# Altium PCB FlybackV1.0.PcbDoc
Units mm, origin at the board's own origin, x right, y up, seen from the top; angles counter-clockwise.
Board outline 151 x 58 mm, 2 copper layers (Top Layer, Bottom Layer), stack 1.671 mm thick; 111 components, 51 nets, 238 pads, 96 vias.
Unrouted connection lines stored in the file: 2.
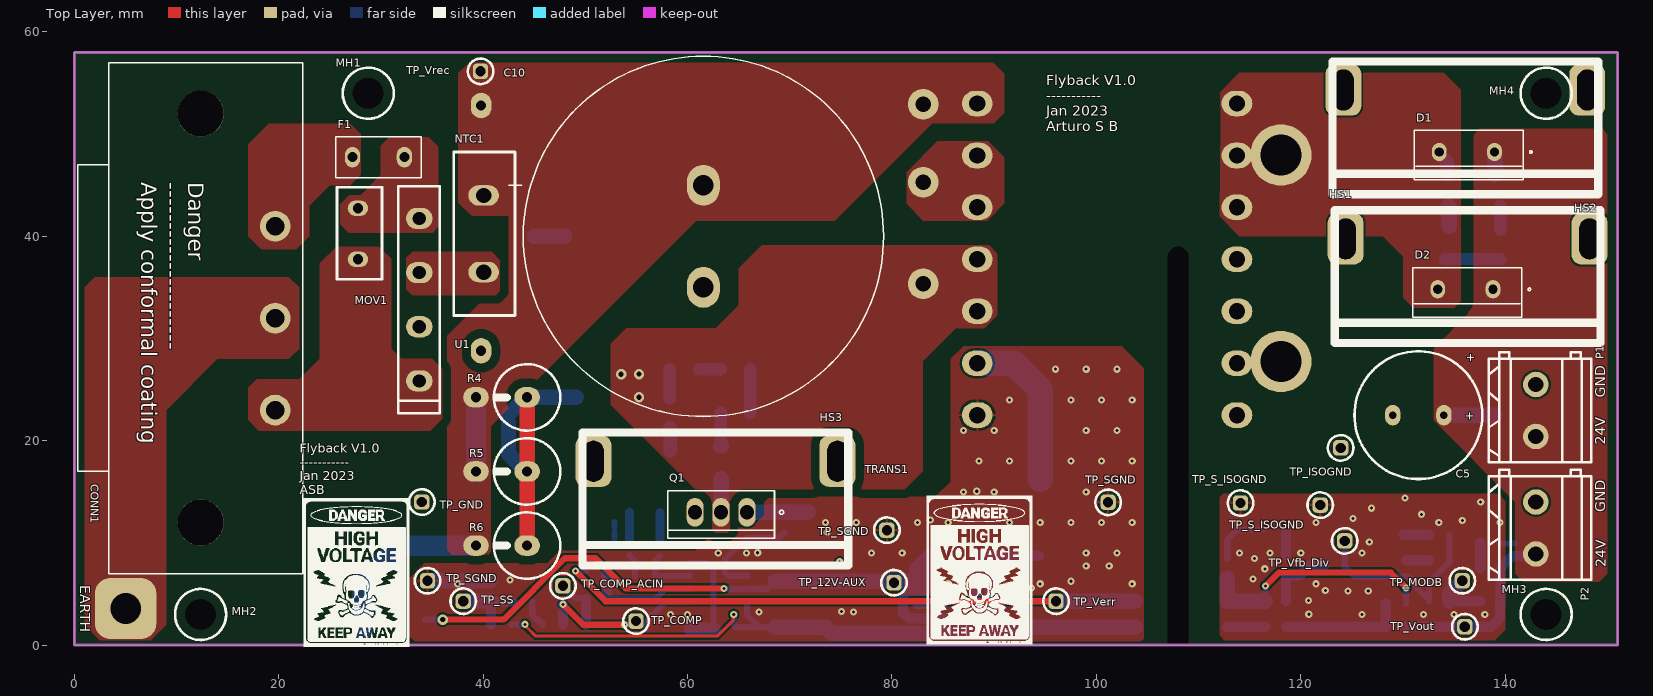
[diagram p0: Top Layer view]
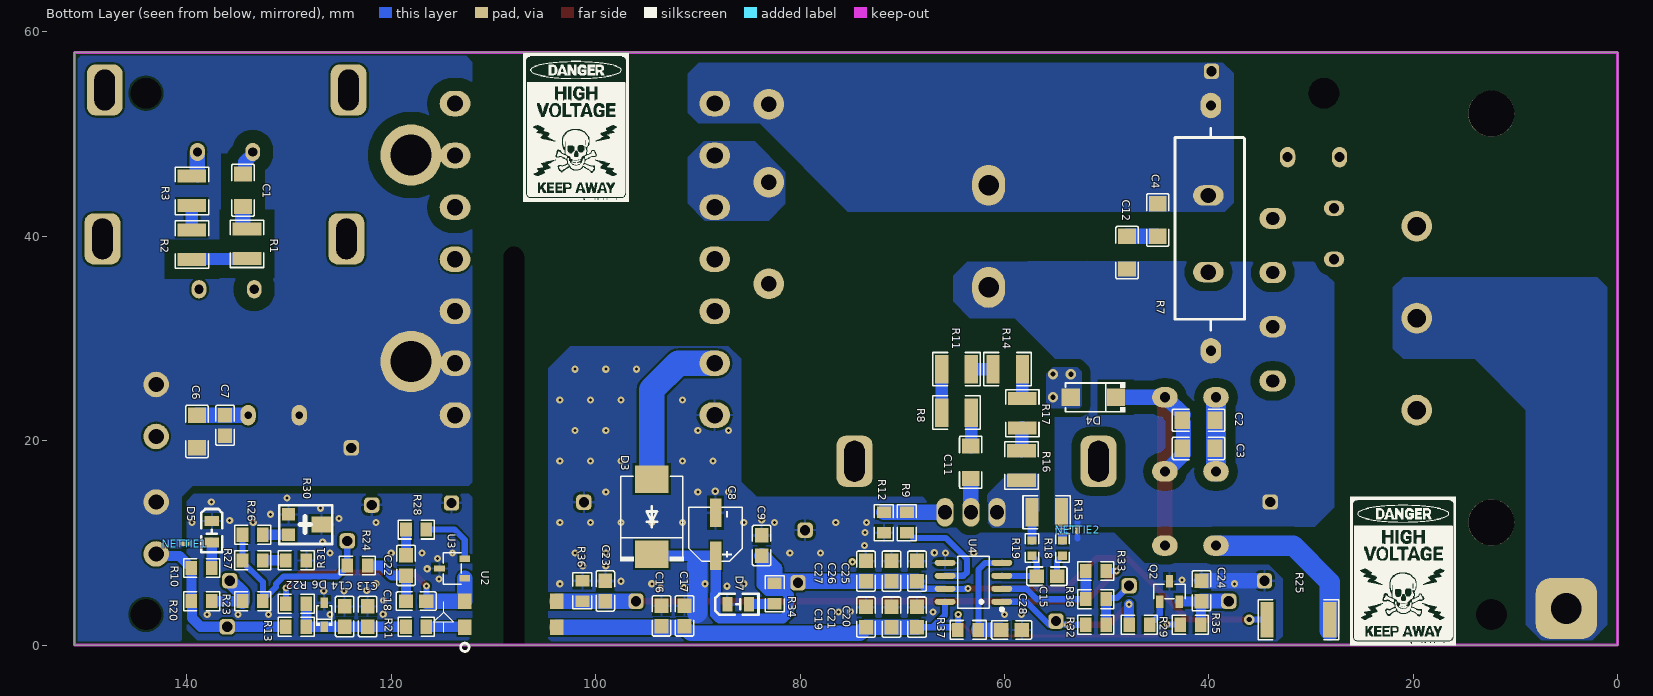
[diagram p1: Bottom Layer view, seen from below]

## Layer stack, top to bottom
Top Solder: solder mask 0.0102, Solder Resist, Dk 3.5
Top Layer: signal copper 0.0356
Dielectric 1: dielectric 1.6, FR-4, Dk 4.8
Bottom Layer: signal copper 0.0356
Bottom Solder: solder mask 0.0102, Solder Resist, Dk 3.5

## Board outline
0,58 0,0 151,0 151,58

## Design rules (kind name [scope] priority, off if disabled: settings)
Clearance SecHV_To_SecLV [InNetClass('HV_REF') vs InNetClass('LV-ISO')] p1: gap=1.25 ignorepadtopadclearanceinfootprint=TRUE
Clearance PRI_To_SEC [InNetClass('PRI') vs InNetClass('SEC')] p2: gap=5 ignorepadtopadclearanceinfootprint=FALSE
Clearance HVAC_To_HV&LV [InNetClass('HVAC') vs (InNetClass('HVAC') OR InNetClass('HV') OR InNetClass('LV') OR InNetClass('LV-ISO'))] p3: gap=0.86 ignorepadtopadclearanceinfootprint=FALSE
Clearance PriHV_To_PriLV_Coated [InNetClass('HV') vs InNetClass('LV')] p4: gap=0.86 ignorepadtopadclearanceinfootprint=FALSE // This rule assumes peak voltage of 500V
Clearance PriLV_To_PriLV [InNetClass('LV') vs InNetClass('LV')] p5: gap=0.2 ignorepadtopadclearanceinfootprint=FALSE
Clearance [All] p6: gap=0.2 ignorepadtopadclearanceinfootprint=FALSE
ComponentClearance [All] p1: gap=0.1 collisioncheckmode=3 verticalgap=0.1 showdistances=TRUE
Creepage PriHV_To_SecLV_Creepage [InNetClass('PRI') vs InNetClass('SEC')] p1: checkdistance=5 // This rule (5mm creepage distance) assumes material group III and worst pollution.
Height [All] p1: minheight=0 maxheight=60 prefheight=12.7
HoleSize [All] p1: absolutevalues=TRUE maxlimit=10 minlimit=0.025 maxpercent=80.000 minpercent=20.000
PolygonConnect Power_Planes [InNetClass('POWER_TRACE')] p1: connectstyle=Direct reliefconductorwidth=0.254 reliefentries=4 polygonreliefangle="90 Angle" airgapwidth=0.254
PolygonConnect [All] p2: thpad.connectstyle=Relief thpad.reliefconductorwidth=0.254 thpad.reliefentries=4 thpad.polygonreliefangle="90 Angle" thpad.airgapwidth=0.254 smdpad.connectstyle=Relief smdpad.reliefconductorwidth=0.254 smdpad.reliefentries=4 smdpad.polygonreliefangle="90 Angle" smdpad.airgapwidth=0.254 via.connectstyle=Direct via.reliefconductorwidth=0.254 via.reliefentries=4 via.polygonreliefangle="90 Angle" via.airgapwidth=0.254
RoutingVias [All] p1: holewidth=0.711 width=1.27 viastyle="Through Hole" minholewidth=0.711 minwidth=1.27 maxholewidth=0.711 maxwidth=1.27
ShortCircuit NETTIE_SEC [InNet('S_ISO_GND') vs InNet('ISO_GND')] p1: allowed=TRUE
ShortCircuit NETTIE_PRI [InNet('S_GND') vs InNet('GND')] p2: allowed=TRUE
ShortCircuit [All] p3: allowed=FALSE
SilkToSilkClearance [All] p1: silktosilkclearance=0
SilkToSolderMaskClearance [IsPad] p1: minsilkscreentomaskgap=0 clearancetoexposedcopper=TRUE
SolderMaskExpansion Via [IsVia] p1: expansion=0.102 istentingtop=TRUE
SolderMaskExpansion [All] p2: expansion=0.102 istentingtop=FALSE
Width [All] p1: maxlimit=6 minlimit=0.3 preferedwidth=1.5
24 further rules are at their usual default settings.

## Classes and differential pairs
net class POWER_TRACE: EARTH_GND GND HALF_PRI ISO_GND NetC1_1 NetC1_2 NetC2_1 NetC4_1 NetC11_1 NetCONN1_L NetCONN1_N NetF1_1 NetR1_2 NetR2_1 NetR8_1 NetR11_2 NetR14_2 NetR16_1 Vout Vrec Vrec-NTC Vsense Vsense_fil_H Vsense_fil_L
net class HV_REF: NetC1_1 NetC1_2 NetR1_2
net class SEC: ISO_GND NetC1_1 NetC1_2 NetC13_2 NetC18_1 NetC18_2 NetC22_1 NetD5_1 NetHS1_HSMH NetHS2_HSMH NetR1_2 NetR2_1 NetR20_1 NetR21_1 NetR23_1 NetR26_1 NetR27_1 NetR28_1 S_ISO_GND Vout
net class PRI: 12V-AUX EARTH_GND GND HALF_PRI NetC2_1 NetC4_1 NetC11_1 NetC11_2 NetC23_2 NetC24_1 NetC28_1 NetCONN1_L NetCONN1_N NetD3_2 NetD7_1 NetF1_1 NetQ1_1 NetQ2_2 NetR8_1 NetR11_2 NetR14_2 NetR16_1 NetR32_2 NetR33_1 S_GND Vcomp Vpwm Vrec Vrec-NTC Vref-5V Vsense Vsense_fil_H Vsense_fil_L
net class HVAC: EARTH_GND NetCONN1_L NetCONN1_N NetF1_1
net class LV: 12V-AUX GND NetC23_2 NetC24_1 NetC28_1 NetD3_2 NetD7_1 NetQ1_1 NetQ2_2 NetR16_1 NetR32_2 NetR33_1 S_GND Vcomp Vpwm Vrec Vref-5V Vsense Vsense_fil_H Vsense_fil_L
net class LV-ISO: ISO_GND NetC1_1 NetC1_2 NetC13_2 NetC18_1 NetC18_2 NetC22_1 NetD5_1 NetR1_2 NetR2_1 NetR20_1 NetR21_1 NetR23_1 NetR26_1 NetR27_1 NetR28_1 S_ISO_GND Vout
net class HV: NetC2_1 NetC4_1 NetC11_1 NetC11_2 NetCONN1_E NetR8_1 NetR11_2 NetR14_2 Vrec Vrec-NTC

## Components (designator, comment, footprint, x,y, rotation, side; value= is the part's Value field where it differs from the comment)
C1 "CAP_33P_1206_630V_COG_5%" CAP_1206 134.5,44.507 r270 bottom value=33pF
C2 "CAP_33N_1206_630V_X7R_10%" CAP_1206 41,22 r180 bottom value=33nF
C3 "CAP_33N_1206_630V_X7R_10%" CAP_1206 41,19.25 r180 bottom value=33nF
C4 "CAP_33N_1206_630V_X7R_10%" CAP_1206 45,41.593 r90 bottom value=33nF
C5 "CAP_1M5_35V_20%_TH-Radial-P5mm-D12.5mm-H16mm" CAP_TH_Radial_P5mm_D12.5mm_H16mm 131.5,22.5 r90 top value=1.5mF
C6 "CAP_100N_1206_35V_X7R_10%" CAP_1206 139,20.907 r90 bottom value=100nF
C7 "CAP_1U_0805_50V_X7R_10%" CAP_0805 136.25,20.5 r90 bottom value=1uF
C8 "CAP_22U_35V_20%_SMD-D5mm-L5.3mm" CAP_SMD_D5mm-L5.3mm 88.25,10.75 r90 bottom value=22uF
C9 "CAP_100N_0805_50V_X7R_10%" CAP_0805 83.75,10.75 r270 bottom value=100nF
C10 "CAP_390U_450V_20%_TH-Radial-P10mm-D35mm-H27.5mm" CAP_TH_Radial_P10mm_D35mm_H27.5mm 61.549,39.999 r180 top locked value=390uF
C11 "CAP_33P_1206_630V_COG_5%" CAP_1206 63.3,17.893 r90 bottom value=33pF
C12 "CAP_33N_1206_630V_X7R_10%" CAP_1206 48,38.407 r90 bottom value=33nF
C13 "CAP_10U_0805_50V_X5R_10%" CAP_0805 122.3,3.8 r270 bottom value=10uF
C14 "CAP_100N_0805_50V_X7R_10%" CAP_0805 124.55,3.8 r270 bottom value=100nF
C15 "CAP_1N_0805_25V_X7R_10%" CAP_0805 56.841,6.741 r180 bottom value=1nF
C16 "CAP_100N_0805_50V_X7R_10%" CAP_0805 93.55,3.855 r270 bottom value=100nF
C17 "CAP_10U_0805_50V_X5R_10%" CAP_0805 91.3,3.855 r270 bottom value=10uF
C18 "CAP_120P_0805_50V_X7R_10%" CAP_0805 118.55,4.3 r180 bottom value=120pF
C19 "CAP_100N_0805_50V_X7R_10%" CAP_0805 73.549,3.745 r270 bottom value=100nF
C20 "CAP_10U_0805_50V_X5R_10%" CAP_0805 68.549,3.745 r270 bottom value=10uF
C21 "CAP_10U_0805_50V_X5R_10%" CAP_0805 71.049,3.745 r270 bottom value=10uF
C22 "CAP_22N_0805_50V_X7R_10%" CAP_0805 118.55,8.8 r270 bottom value=22nF
C23 "CAP_22N_0805_50V_X7R_10%" CAP_0805 99.05,6.3 r270 bottom value=22nF
C24 "CAP_4N7_0805_50V_X7R_10%" CAP_0805 40.724,4.311 r90 bottom value=4.7nF
C25 "CAP_10U_0805_50V_X5R_10%" CAP_0805 68.549,8.245 r270 bottom value=10uF
C26 "CAP_10U_0805_50V_X5R_10%" CAP_0805 71.049,8.245 r270 bottom value=10uF
C27 "CAP_100N_0805_50V_X7R_10%" CAP_0805 73.549,8.245 r270 bottom value=100nF
C28 "CAP_4N7_0805_50V_X7R_10%" CAP_0805 60.299,1.495 r180 bottom value=4.7nF
CONN1 "AC_CONNECTOR" AC_CONNECTOR_703W-00/54 16,32 r90 top locked
D1 "DIODE_600V_3KPW8_SIC_T0220" T0-220-2 138.949,48.249 r180 top
D2 "DIODE_600V_3KPW8_SIC_T0220" T0-220-2 138.799,34.817 r180 top
D3 "DIODE_200V_3A_20ns_SMC" DIODE_SMC 94.5,12.564 r90 bottom
D4 "DIODE_600V_1A_100ns_SMA" SMA_L4.4-W2.6-LS5.0-RD 51.299,24.245 r0 bottom
D5 "LED_GREEN_0805_25mA" LED_0805 137.55,11.151 r270 bottom
D6 "ZENER_16V_SOD323_200mW" ZENER_SOD-323 126.55,2.973 r90 bottom
D7 "LED_GREEN_0805_25mA" LED_0805 86.101,4 r180 bottom
F1 "FUSE_3.15A_250VAC_64VDC_SlowBlow_BoardMount" FUSE_P5.08mm_W4mm_L8.35mm_H7.8mm 29.75,47.75 r180 top locked
HS1 "HEATSINK_TO-220_14.7KPW" HEATSINK_TO-220_HSS-B20-NPS-02 136.317,39.75 r0 top locked
HS2 "HEATSINK_TO-220_14.7KPW" HEATSINK_TO-220_HSS-B20-NPS-02 136.099,54.316 r0 top locked
HS3 "HEATSINK_TO-220_14.7KPW" HEATSINK_TO-220_HSS-B20-NPS-02 62.73,17.99 r0 top locked
MH1 "MOUNTINGHOLE_HDM3_OD3mm" STANDOFF_HDM3_OD5MM 28.75,54 r0 top locked
MH2 "MOUNTINGHOLE_HDM3_OD3mm" STANDOFF_HDM3_OD5MM 12.35,3 r0 top locked
MH3 "MOUNTINGHOLE_HDM3_OD3mm" STANDOFF_HDM3_OD5MM 144,3 r0 top locked
MH4 "MOUNTINGHOLE_HDM3_OD3mm" STANDOFF_HDM3_OD5MM 144,54 r0 top locked
MOV1 "MOV_VC595_VAC230" MOV_P5mm_D9mm_W4.4mm 27.75,40.25 r90 top locked
NETTIE1 "NETTIE" NETTIE 140.382,9.931 r270 bottom
NETTIE2 "NETTIE" NETTIE 52.841,11.496 r0 bottom
NTC1 "NTC_15R_4.4A_D16mm" NTC_P7.5mm_D16mm 40.049,40.249 r270 top locked
P1 "SCREWTERMINAL_P5.08mm" SCREW_TERMINAL_P5.08mm 143,20.42 r90 top locked
P2 "SCREWTERMINAL_P5.08mm" SCREW_TERMINAL_P5.08mm 143,8.92 r90 top locked
Q1 "NMOS_700V_IPA70R360P7SXKSA1" T0-220-3 65.813,12.999 r180 top locked
Q2 "PNP_12V_2.5A_SOT-23-3" SOT-23-3 43.849,5.245 r270 bottom
R1 "RES_82R_1210_0.5W_1%" RES_1210 134.1,40.7 r270 bottom value=82R
R2 "RES_82R_1210_0.5W_1%" RES_1210 139.5,40.633 r270 bottom value=82R
R3 "RES_0R_1206_0.25W_1%" RES_1210 139.5,45.883 r270 bottom value=0R
R4 "RES_9K1_TH_5W_5%_AXIAL" RES_TH_AXIAL_L17.5mm_D6.5mm_Vertical 44.299,24.245 r180 top value=9K1R
R5 "RES_9K1_TH_5W_5%_AXIAL" RES_TH_AXIAL_L17.5mm_D6.5mm_Vertical 44.299,16.995 r180 top value=9K1R
R6 "RES_9K1_TH_5W_5%_AXIAL" RES_TH_AXIAL_L17.5mm_D6.5mm_Vertical 44.299,9.745 r180 top value=9K1R
R7 "RES_200K_TH_1W_5%_AXIAL" RES_TH_AXIAL_L18mm_D6.8mm 39.8,28.8 r90 bottom value=200KR
R8 "RES_82R_1210_0.5W_1%" RES_1210 66.133,22.75 r180 bottom value=82R
R9 "RES_12R_0805_0.125W_5%" RES_0805 69.549,11.995 r270 bottom value=12R
R10 "RES_1K5_0805_0.125W_1%" RES_0805 138.55,7.55 r0 bottom value=1K5
R11 "RES_82R_1210_0.5W_1%" RES_1210 66.133,27 r180 bottom value=82R
R12 "RES_10K_0805_0.125W_1%" RES_0805 71.799,11.995 r90 bottom value=10K
R13 "RES_680R_0805_0.125W_1%" RES_0805 129.3,1.8 r0 bottom value=680R
R14 "RES_82R_1210_0.5W_1%" RES_1210 61.133,27 r180 bottom value=82R
R15 "RES_220mR_1210_0.75W_1%" RES_1210 57.313,12.999 r180 bottom value=220mR
R16 "RES_0R_1206_0.25W_1%" RES_1210 58.332,19.017 r270 bottom value=0R
R17 "RES_82R_1210_0.5W_1%" RES_1210 58.25,24.133 r270 bottom value=82R
R18 "RES_82R_0603_0.1W_1%" RES_0603 54.313,9.496 r90 bottom value=82R
R19 "RES_82R_0603_0.1W_1%" RES_0603 57.313,9.496 r90 bottom value=82R
R20 "RES_22R_0805_0.125W_1%" RES_0805 138.55,4.3 r0 bottom value=22R
R21 "RES_1K8_0805_0.125W_1%" RES_0805 117.55,1.8 r0 bottom value=1K8
R22 "RES_5K6_0805_0.125W_1%" RES_0805 129.3,4.05 r180 bottom value=5K6
R23 "RES_11K8_0805_0.125W_1%" RES_0805 133.55,4.3 r0 bottom value=11K8
R24 "RES_0R_0805_0.125W_1%" RES_0805 123.3,7.8 r180 bottom value=0R
R25 "RES_560K_2512_1W_1%" RES_2512 31.233,2.495 r0 bottom value=560K
R26 "RES_0R_0805_0.125W_1%" RES_0805 133.55,10.8 r0 bottom value=0R
R27 "RES_1K37_0805_0.125W_1%" RES_0805 133.55,8.3 r0 bottom value=1K37
R28 "RES_180K_0805_0.125W_1%" RES_0805 117.55,11.3 r0 bottom value=180K
R29 "RES_0R_0805_0.125W_1%" RES_0805 46.799,1.995 r0 bottom value=0R
R30 "RES_5K_SMD-POT_0.15mW_25%" RES_SMD_POT_3PINS 128.425,11.8 r0 bottom value=5KR
R31 "RES_0R_0805_0.125W_1%" RES_0805 129.3,8.3 r0 bottom value=0R
R32 "RES_22R_0805_0.125W_1%" RES_0805 51.049,1.995 r180 bottom value=22R
R33 "RES_22K_0805_0.125W_1%" RES_0805 51.049,7.245 r180 bottom value=22K
R34 "RES_1K_0805_0.125W_1%" RES_0805 82.475,5.035 r90 bottom value=1K
R35 "RES_100K_0805_0.125W_1%" RES_0805 41.799,1.995 r0 bottom value=100K
R36 "RES_1K5_0805_0.125W_1%" RES_0805 101.3,5.3 r270 bottom value=1K5
R37 "RES_3K_0805_0.125W_1%" RES_0805 63.549,1.495 r0 bottom value=3K
R38 "RES_22K_0805_0.125W_1%" RES_0805 51.049,4.495 r180 bottom value=22K
TP_12V-AUX "TESTPOINT_BD2.5mm_MHD1mm" Test_Point_BD2.5mm_MHD_1mm 80.193,6.106 r90 top
TP_COMP "TESTPOINT_BD2.5mm_MHD1mm" Test_Point_BD2.5mm_MHD_1mm 54.95,2.35 r90 top
TP_COMP_ACIN "TESTPOINT_BD2.5mm_MHD1mm" Test_Point_BD2.5mm_MHD_1mm 47.8,5.8 r90 top
TP_GND "TESTPOINT_BD2.5mm_MHD1mm" Test_Point_BD2.5mm_MHD_1mm 34,14 r90 top
TP_ISOGND "TESTPOINT_BD2.5mm_MHD1mm" Test_Point_BD2.5mm_MHD_1mm 123.9,19.3 r90 top
TP_MODB "TESTPOINT_BD2.5mm_MHD1mm" Test_Point_BD2.5mm_MHD_1mm 135.8,6.3 r90 top
TP_S_ISOGND "TESTPOINT_BD2.5mm_MHD1mm" Test_Point_BD2.5mm_MHD_1mm 121.9,13.7 r90 top
TP_S_ISOGND "TESTPOINT_BD2.5mm_MHD1mm" Test_Point_BD2.5mm_MHD_1mm 114.1,13.9 r90 top
TP_SGND "TESTPOINT_BD2.5mm_MHD1mm" Test_Point_BD2.5mm_MHD_1mm 101.148,13.977 r90 top
TP_SGND "TESTPOINT_BD2.5mm_MHD1mm" Test_Point_BD2.5mm_MHD_1mm 34.55,6.3 r90 top
TP_SGND "TESTPOINT_BD2.5mm_MHD1mm" Test_Point_BD2.5mm_MHD_1mm 79.5,11.25 r90 top
TP_SS "TESTPOINT_BD2.5mm_MHD1mm" Test_Point_BD2.5mm_MHD_1mm 38.05,4.3 r90 top
TP_Verr "TESTPOINT_BD2.5mm_MHD1mm" Test_Point_BD2.5mm_MHD_1mm 96.05,4.3 r90 top
TP_Vfb_Div "TESTPOINT_BD2.5mm_MHD1mm" Test_Point_BD2.5mm_MHD_1mm 124.3,10.2 r180 top
TP_Vout "TESTPOINT_BD2.5mm_MHD1mm" Test_Point_BD2.5mm_MHD_1mm 136.05,1.8 r90 top
TP_Vrec "TESTPOINT_BD2.5mm_MHD1mm" Test_Point_BD2.5mm_MHD_1mm 39.744,56.146 r90 top (schematic designator TP_VREC)
TRANS1 "Transformer_ETD34_SPLIT" ETD34_HORIZONTAL_EXTRAPADS 101.049,37.749 r90 top locked
U1 "DiodeBrige_600V_4A_TH-4-SIP-5.3mm" 4_SIP 33.75,41.75 r270 top locked
U2 "OPTOCOUPLER_SFH615A-4XSMT/R" 4-SMD 108.299,3.015 r0 bottom
U3 "TL431AQDBZR" SOT-23 112.8,6.55 r180 bottom
U4 "UC3842AD8TR" SOIC-8 60.254,4.245 r90 bottom locked

## Footprints (in the part's own frame and the unit in brackets; to place one, negate y for a bottom-side part, rotate by r counter-clockwise, add the part's x,y. Pads: shape width x height; smd on the part's side, far side on the other; paste and mask are expansions set on the pad)
4-SMD [mm]
  rect 1.3x1.5 smd: 1(4.5,1.27) 2(4.5,-1.27) 3(-4.5,-1.27) 4(-4.5,1.27)
  silkscreen extent 4.08,-1.25 7.58,3.64, body extent -5.23,-2.55 5.23,2.55, height 4.61
4_SIP [mm]
  oval 2.08x2.6 hole 1.3: 1(0,0) 2(5.3,0) 3(10.6,0) 4(15.9,0)
  silkscreen extent -3.16,-2.04 19.06,2.01, body extent -3.16,-2.02 19.09,2.02, height 19.1
AC_CONNECTOR_703W-00/54 [mm]
  round 3 hole 1.8: E(0,-3.65) L(9,-3.65) N(-9,-3.65)
  round 4.5 hole 4.5: MH1(-20,3.65) MH2(20,3.65)
  silkscreen extent -25,-6.35 25,15.65, body extent -25,-9.1 25,15.5, height 28.21
CAP_0805 [mm]
  rect 1.41x1.35 smd: 1(0,0) 2(2,0)
  silkscreen extent -0.96,-0.9 2.96,0.9
CAP_1206 [mm]
  rect 1.485x1.728 smd: 1(-1.593,0) 2(1.593,0)
  silkscreen extent -2.56,-1.09 2.56,1.09
CAP_SMD_D5mm-L5.3mm [mm]
  rect 2.8x1.1 smd: 1(-2,0) 2(2.2,0)
  silkscreen extent -2.56,-2.62 2.76,2.65
CAP_TH_Radial_P5mm_D12.5mm_H16mm [mm]
  oval 2x1.5 hole 0.75: 1(0,-2.5) 2(0,2.5)
  silkscreen extent -6.25,-6.25 6.25,6.25, body extent -6.25,-6.25 6.25,6.25, height 16
CAP_TH_Radial_P10mm_D35mm_H27.5mm [mm]
  oval 3.2x4 hole 2: 1(0,-5) 2(0,5)
  silkscreen extent -17.63,-17.62 19.02,17.63, body extent -17.5,-17.5 17.5,17.5, height 27.5
DIODE_SMC [mm]
  rect 2.7x3.3 smd: 1(-3.686,0) 2(3.686,0)
  silkscreen extent -4.36,-3.1 3.98,3.1
ETD34_HORIZONTAL_EXTRAPADS [mm]
  round 3 hole 1.5: 1(15.172,18) 2(7.543,18) 3(-2.406,18)
  oval 2.5x3 hole 1.6: 1(15.24,12.7) 2(5.08,12.7) 2(10.16,12.7) 3(-5.08,12.7) 3(0,12.7) 4(-10.16,12.7) 5(-15.24,12.7) 6(5.08,-12.7) 6(10.16,-12.7) 6(15.24,-12.7) 7(-15.24,-12.7) 7(-10.16,-12.7) 7(-5.08,-12.7) 100(0,-12.7)
  round 6 hole 4: 6(10.202,-17) 7(-10,-17)
  body extent -19.8,-20.7 19.8,20.7, height 28.4
FUSE_P5.08mm_W4mm_L8.35mm_H7.8mm [mm]
  oval 1.5x2 hole 1: 1(-2.54,0) 2(2.54,0)
  silkscreen extent -4.18,-2 4.18,2, body extent -4.2,-2 4.2,2, height 7.8
HEATSINK_TO-220_HSS-B20-NPS-02 [mm]
  rrect50% 3.5x5 hole 2 slot 4 at 90 deg: HSMH(-11.933,0) HSMH(11.933,0)
  silkscreen extent -13,-10.2 13,2.8, body extent -12.7,-10.2 12.7,2.5, height 29.98
LED_0805 [mm]
  rect 1x1.4 smd: 1(1.101,0) 2(-1,0)
  silkscreen extent -2.17,-1.04 2.04,1.01
MOV_P5mm_D9mm_W4.4mm [mm]
  oval 1.5x2 hole 1: 1(-2.5,0) 2(2.5,0)
  silkscreen extent -4.44,-2.35 4.56,2.05, body extent -4.41,-2.34 4.59,2.06, height 11
NETTIE [mm]
  round 0.5 smd: GNDA(0,0.4) GNDB(0,0)
NTC_P7.5mm_D16mm [mm]
  oval 2x3 hole 1.5: 1(-3.75,0) 2(3.75,0)
  silkscreen extent -8,-2.93 8,3.07, body extent -8,-3 8,3, height 20
RES_0603 [mm]
  rect 0.806x0.864 smd: 1(-0.753,0) 2(0.753,0)
  silkscreen extent -1.39,-0.66 1.39,0.66
RES_0805 [mm]
  rect 1.133x1.377 smd: 1(-1,0) 2(1,0)
  silkscreen extent -1.76,-0.92 1.76,0.92
RES_1210 [mm]
  rect 1.283x2.808 smd: 1(0,0) 2(2.883,0)
  silkscreen extent -0.87,-1.63 3.75,1.63
RES_2512 [mm]
  rect 1.283x3.456 smd: 1(-3.066,0) 2(3.066,0)
  silkscreen extent -3.94,-1.96 3.94,1.96
RES_SMD_POT_3PINS [mm]
  rect 1.3x1.2 smd: 1(1.625,-1) 3(1.625,1)
  rect 2x1.524 smd: 2(-1.625,0)
  silkscreen extent -2.67,-1.91 2.54,1.91
RES_TH_AXIAL_L17.5mm_D6.5mm_Vertical [mm]
  oval 2.5x2 hole 1: 1(0,0) 2(5,0)
  silkscreen extent -3.25,-3.25 3.25,3.25
RES_TH_AXIAL_L18mm_D6.8mm [mm]
  oval 2.5x2 hole 1: 1(0,0) 2(24,0)
  silkscreen extent 2,-3.29 21.75,3.51
SCREW_TERMINAL_P5.08mm [mm]
  round 2.5 hole 1.5: 1(0,0) 2(5.08,0)
  silkscreen extent -2.54,-5.4 8.24,4.6
SMA_L4.4-W2.6-LS5.0-RD [mm]
  rect 1.8x1.7 smd: 1(-2.192,0) 2(2.192,0)
  silkscreen extent -3.11,-1.48 2.73,1.48
SOIC-8 [mm]
  oval 0.588x2.045 smd: 1(0,0) 2(1.27,0) 3(2.54,0) 4(3.81,0) 5(3.81,5.545) 6(2.54,5.545) 7(1.27,5.545) 8(0,5.545)
  silkscreen extent -0.9,-0.15 4.43,4.29
SOT-23 [mm]
  rect 1.07x0.6 smd: 1(0,0) 2(0,1.9) 3(-2.47,0.95)
  silkscreen extent -2.11,-0.59 -0.36,2.49
SOT-23-3 [mm]
  rect 1.25x0.7 smd: 1(1,0.95) 2(1,-0.95) 3(-1,0)
  silkscreen extent -0.73,-1.53 0.73,1.53
STANDOFF_HDM3_OD5MM [mm]
  round 0 hole 3 unplated: 50(0,0)
  silkscreen extent -2.5,-2.5 2.5,2.5
T0-220-2 [mm]
  oval 1.44x1.8 hole 0.9: 1(0,0) 2(5.4,0)
  silkscreen extent -3.68,-2.13 7.85,2.73, body extent -2.68,-1.98 7.71,2.62, height 15.75
T0-220-3 [mm]
  oval 1.68x2.8 hole 1.4: 1(0,0) 2(2.54,0) 3(5.08,0)
  silkscreen extent -3.58,-2.12 7.77,2.53, body extent -2.57,-1.99 7.65,2.4, height 17.3
Test_Point_BD2.5mm_MHD_1mm [mm]
  rrect50% 1.5x1.5 hole 1: 1(0,0)
  silkscreen extent -1.25,-1.25 1.25,1.25
ZENER_SOD-323 [mm]
  rect 1x0.75 smd: 1(-1.173,0) 2(1.173,0)
  silkscreen extent -1.08,-0.8 0.9,0.8, body extent -1.26,-0.65 1.26,0.65, height 1.1

## Part data
C1 C11: "630V 33pF C0G ±5% 1206  Multilayer Ceramic Capacitors MLCC - SMD/SMT ROHS", JLC#=C415521, Package=1206, Voltage=630V, Dialectric=COG, Part_Number=GRM31A5C2J330JW01D
C2 C3 C4 C12: "Ceramic cap 33nF, 630V , X7R , 1206 , 10%", JLC#=C710477, Package=1206, Voltage=630V, Dialectric=X7R, Part_Number=NM1206B333K631CEGN
C5: "1500 µF 35 V Aluminum Electrolytic Capacitors Radial, Can 6000 Hrs @ 105°C", JLC#=?, Voltage_Max=35V, ESR=12mR, Irms_Max @ 100kHz=3.68A, Irms_Max @ 120Hz=2.208A, Part_Number=35ZLQ1500MEFC12.5X30
C6: "50V 100nF X7R ±10% 1206  Multilayer Ceramic Capacitors MLCC - SMD/SMT ROHS", JLC#=C24497, Package=1206, Voltage=35V, Dialectric=X7R, Part_Number=CL31B104KBCNNNC
C7: "50V 1uF X7R ±10% 0805  Multilayer Ceramic Capacitors MLCC - SMD/SMT ROHS", JLC#=C28323, Package=0805, Voltage=50V, Dialectric=X7R, Part_Number=CL21B105KBFNNNE
C8: "-45℃~+105℃ 1000hrs@105℃ 22uF 5.3mm 35V 5mm ±20% SMD,D5xL5.3mm  Aluminum Electrolytic Capacitors - SMD ROHS", JLC#=C249702, Voltage_Max=35V, Irms_Max=?, Part_Number=VES220M1VTR-0505
C9 C14 C16 C19 C27: "50V 100nF X7R ±10% 0805  Multilayer Ceramic Capacitors MLCC - SMD/SMT ROHS", JLC#=C49678, Package=0805, Voltage=50V, Dialectric=X7R, Part_Number=CC0805KRX7R9BB104
C10: "Polarized Capacitor (Radial) 390UF, 450V, 20%, 2.05A @ 120Hz TH Radial 10m Pitch , 35mm Diameter , 27.5mm Heigth", JLC#=?, Voltage_Max=450V, Irms_Max="2.05 A @ 120Hz", Part_Number=ESMR401VSN391MA25S
C13 C17 C20 C21 C25 C26: "50V 10uF X5R ±10% 0805  Multilayer Ceramic Capacitors MLCC - SMD/SMT ROHS", JLC#=C440198, Package=0805, Voltage=50V, Dialectric=X5R, Part_Number=GRM21BR61H106KE43L
C15: "25V 1nF X7R ±10% 0805  Multilayer Ceramic Capacitors MLCC - SMD/SMT ROHS", JLC#=C519910, Package=0805, Voltage=25V, Dialectric=X7R, Part_Number=CC0805KRX7R8BB102
C18: "50V 120pF X7R ±10% 0805  Multilayer Ceramic Capacitors MLCC - SMD/SMT ROHS", JLC#=C376930, Package=0805, Voltage=50V, Dialectric=X7R, Part_Number=TCC0805X7R121K500BT
C22 C23: "50V 22nF X7R ±10% 0805  Multilayer Ceramic Capacitors MLCC - SMD/SMT ROHS", JLC#=C1729, Package=0805, Voltage=50V, Dialectric=X7R, Part_Number=CL21B223KBANNNC
C24 C28: "50V 4.7nF X7R ±10% 0805  Multilayer Ceramic Capacitors MLCC - SMD/SMT ROHS", JLC#=C1744, Package=0805, Voltage=50V, Dialectric=X7R, Part_Number=0805B472K500NT
CONN1: "Power Entry Connector Receptacle, Male Blades IEC 320-C14 Panel Mount, Flange; Through Hole, Right Angle", Current=10A, Voltage=250Vac, Part_Number=703W-00/54
D1 D2: "Diode Silicon Carbide Schottky 600 V 5A Through Hole TO-220-2", Current="4A @ Tc = 135degC", JLC#=?, Voltage=600V, ComponentLink1Description="New link", Part_Number=C3D02060A, Rjc=3.8K/W, Rjlead=30K/W, Tjmax=150degC, Trr=0ns
D3: "3A 10uA@200V 200V 1.15V@3A SMC(DO-214AB)  Diodes - General Purpose ROHS", Current=3A, JLC#=C156341, Voltage=200V, ComponentLink1Description="New link", Part_Number=S3D-13-F, Rjlead=12K/W, Tjmax=150degC, Trr=20ns
D4: "1.7V@1A 1uA@600V 100ns Single 1A -55℃~+150℃@(Tj) 600V SMA  Diodes - Fast Recovery Rectifiers ROHS", Current=1A, JLC#=C391757, Voltage=600V, ComponentLink1Description="New link", Part_Number=US1J_R1_00001, Rjlead=30K/W, Tjmax=150degC, Trr=100ns
D5 D7: "Green/Yellow-Green 0805  Light Emitting Diodes (LED) ROHS", JLC#=C264433, Package=0805, Imax=25mA, Part_Number=17-215/GPC-AL1M2L/3T, Vforward=2.3V
D6: "0.1uA@11.2V 40Ω 15.3V~17.1V 200mW 16V SOD-323  Zener Diodes ROHS", JLC#=C691210, Package=SOD-323, Power=200mW, Voltage=16V, Part_Number=BZT52C16SQ-7-F
F1: "3.15 A 250 V AC 63 V DC Fuse Board Mount (Cartridge Style Excluded) Through Hole Radial, Box", Rated Current=3.15A, Voltage AC=250Vac, Voltage DC=64Vdc, Part_Number="RSTA 3.15 AMMO", Response_Time="Slow blow"
HS1 HS2 HS3: "Heat Sink TO-220 Aluminum 5.1W @ 75°C Board Level", Package_Cooled=TO-220, Thermal Resistance @ Forced Air Flow="4.20°C/W @ 200 LFM", Thermal Resistance @ Natural=14.71°C/W, Part_Number=HSS-B20-NPS-02
MOV1: "360 V 1.2 kA Varistor 1 Circuit Through Hole Disc 7mm", Part_Number=MOV-07D361K, Response_Time=25ns, Vclamp @ 10A=595V, Vcontinous=230Vrms
NTC1: "Inrush Current Limiter 15 Ohms ±20% 4.4 A 0.630\" (16.00mm)", JLC#=?, Tolerance=20%, CT @ 230VAC=700uF, Diameter=16mm, Irated=4.4A, Part_Number=B57238S0150M000, R25=15R, Thermal cooling time constant (in air)=80s
P1 P2: "Copper 0.2~2 -40℃~+105℃ 15A 300V Green Tin 250℃ 5.08mm 1 26~14 2 P=5.08mm  Screw terminal ROHS", Current=15A, JLC#=C709041, Voltage=300V, Part_Number=JL500-50802G01, Pitch=5.08mm
Q1: "N-Channel Power MOSFET, 700Vds, T0-220-3", JLC#=?, ComponentLink1Description="Manufacturer Link", ComponentLink1URL=http://www.irf.com/, Part_Number=IPA70R360P7SXKSA1, Rds(on)_Max=0.36R, RthJC=4.7K/W, Tj_Max=150deg, Vds_Max=700V
Q2: "12V 625mW 2.5A PNP SOT-23-3  Bipolar Transistors - BJT ROHS", Current=2.5A, JLC#=C500779, Package=SOT-23-3, Power=625mW, Part_Number=FMMT717TA, VCE=12V, VEB=7V
R1 R2 R8 R11 R14 R17: "500mW Thick Film Resistors 200V ±100ppm/℃ ±5% -55℃~+155℃ 82Ω 1210  Chip Resistor - Surface Mount ROHS", JLC#=C728413, Package=1210, Power=500mW, Voltage=200V, Part_Number=RC1210JR-0782RL
R3 R16: "250mW Thick Film Resistors 200V ±800ppm/℃ ±1% -55℃~+155℃ 0Ω 1206  Chip Resistor - Surface Mount ROHS", JLC#=C1788813, Package=1206, Power=250mW, Voltage=200V, Part_Number=1206W4F0000T5E
R4 R5 R6: "9.1 kOhms ±5% 5W Through Hole Resistor Axial Flame Proof, Pulse Withstanding, Safety Metal Oxide Film", JLC#=?, Power=5W, Voltage=750V, Part_Number=ROX5SSJ9K1
R7: "200 kOhms ±5% 1W Through Hole Resistor Axial High Voltage, Pulse Withstanding Metal Film", JLC#=?, Power=1W, Voltage=750V, Part_Number=VR68000002003JAC00
R9: "125mW Thick Film Resistors 150V ±1% ±200ppm/℃ -55℃~+155℃ 12Ω 0805  Chip Resistor - Surface Mount ROHS", JLC#=C17445, Package=0805, Power=125mW, Voltage=150V, Part_Number=0805W8F120JT5E
R10 R36: "125mW Thick Film Resistors 150V ±100ppm/℃ ±1% -55℃~+155℃ 1.5kΩ 0805  Chip Resistor - Surface Mount ROHS", JLC#=C4310, Package=0805, Power=125mW, Voltage=150V, Part_Number=0805W8F1501T5E
R12: "125mW Thick Film Resistors 150V ±100ppm/℃ ±1% -55℃~+155℃ 10kΩ 0805  Chip Resistor - Surface Mount ROHS", JLC#=C17414, Package=0805, Power=125mW, Voltage=150V, Part_Number=0805W8F1002T5E
R13: "125mW Thick Film Resistors 150V ±100ppm/℃ ±1% -55℃~+155℃ 680Ω 0805  Chip Resistor - Surface Mount ROHS", JLC#=C17798, Package=0805, Power=125mW, Voltage=150V, Part_Number=0805W8F6800T5E
R15: "1W Thick Film Resistors 800V ±1% -55℃~+155℃ 560kΩ 2512  Chip Resistor - Surface Mount ROHS", JLC#=C159209, Package=1210, Power=750mW, Voltage=200V, Part_Number=RTT20R220FTE
R18 R19: "100mW Thick Film Resistors 75V ±100ppm/℃ ±1% -55℃~+155℃ 82Ω 0603  Chip Resistor - Surface Mount ROHS", JLC#=C23255, Package=0603, Power=100mW, Voltage=75V, Part_Number=0603WAF820JT5E
R20 R32: "125mW Thick Film Resistors 150V ±100ppm/℃ ±1% -55℃~+155℃ 22Ω 0805  Chip Resistor - Surface Mount ROHS", JLC#=C17561, Package=0805, Power=125mW, Voltage=150V, Part_Number=0805W8F220JT5E
R21: "125mW Thick Film Resistors 150V ±100ppm/℃ ±1% -55℃~+155℃ 1.8kΩ 0805  Chip Resistor - Surface Mount ROHS", JLC#=C17398, Package=0805, Power=125mW, Voltage=150V, Part_Number=0805W8F1801T5E
R22: "125mW Thick Film Resistors 150V ±100ppm/℃ ±1% -55℃~+155℃ 5.6kΩ 0805  Chip Resistor - Surface Mount ROHS", JLC#=C4382, Package=0805, Power=125mW, Voltage=150V, Part_Number=0805W8F5601T5E
R23: "125mW Thick Film Resistors 150V ±100ppm/℃ ±1% -55℃~+155℃ 11.8kΩ 0805  Chip Resistor - Surface Mount ROHS", JLC#=C17420, Package=0805, Power=125mW, Voltage=150V, Part_Number=0805W8F1182T5E
R24 R26 R29 R31: "125mW Thick Film Resistors 150V ±800ppm/℃ ±1% -55℃~+155℃ 0Ω 0805  Chip Resistor - Surface Mount ROHS", JLC#=C17477, Package=0805, Power=125mW, Voltage=150V, Part_Number=0805W8F0000T5E
R25: "1W Thick Film Resistors 800V ±1% -55℃~+155℃ 560kΩ 2512  Chip Resistor - Surface Mount ROHS", JLC#=C175529, Package=2512, Power=1W, Voltage=800V, Part_Number=HR2512F560KE04Z
R27: "125mW Thick Film Resistors 150V ±100ppm/℃ ±1% -55℃~+155℃ 1.37kΩ 0805  Chip Resistor - Surface Mount ROHS", JLC#=C245260, Package=0805, Power=125mW, Voltage=150V, Part_Number=CR0805F1K37P05Z
R28: "125mW Thick Film Resistors 150V ±100ppm/℃ ±1% -55℃~+155℃ 180kΩ 0805  Chip Resistor - Surface Mount ROHS", JLC#=C17501, Package=0805, Power=125mW, Voltage=150V, Part_Number=0805W8F1803T5E
R30: "±25% ±250ppm/℃ 5kΩ SMD  Variable Resistors/Potentiometers ROHS", JLC#=C128557, Package=SMD, Part_Number=VG039NCHXTB502
R33 R38: "125mW Thick Film Resistors 150V ±100ppm/℃ ±1% -55℃~+155℃ 22kΩ 0805  Chip Resistor - Surface Mount ROHS", JLC#=C17560, Package=0805, Power=125mW, Voltage=150V, Part_Number=0805W8F2202T5E
R34: "125mW Thick Film Resistors 150V ±100ppm/℃ ±1% -55℃~+155℃ 1kΩ 0805  Chip Resistor - Surface Mount ROHS", JLC#=C17513, Package=0805, Power=125mW, Voltage=150V, Part_Number=0805W8F1001T5E
R35: "125mW Thick Film Resistors 150V ±100ppm/℃ ±1% -55℃~+155℃ 100kΩ 0805  Chip Resistor - Surface Mount ROHS", JLC#=C149504, Package=0805, Power=125mW, Voltage=150V, Part_Number=0805W8F1003T5E
R37: "125mW Thick Film Resistors 150V ±100ppm/℃ ±1% -55℃~+155℃ 3kΩ 0805  Chip Resistor - Surface Mount ROHS", JLC#=C17661, Package=0805, Power=125mW, Voltage=150V, Part_Number=0805W8F3001T5E
TP_12V-AUX TP_COMP TP_COMP_ACIN TP_GND TP_ISOGND TP_MODB TP_S_ISOGND TP_S_ISOGND TP_SGND TP_SGND TP_SGND TP_SS TP_Verr TP_Vfb_Div TP_Vout TP_Vrec: "Black PC Test Point, Miniature Phosphor Bronze Silver Plating Through Hole Mounting Type", JLC#=?, Base Diameter=1mm, Mounting hole Diameter=1mm, Part_Number=5001
TRANS1: "Flyback converter transformer ETD34, 2 output winding, 1 input winding."
U1: "Full Wave Diode Bridge, 600V, 4A.", JLC#=?, Package="4-SIP (5.3mm picth)", I_MAX=4A, Part_Number=GBU406, V_Max=600V
U2: "Optocoupler Dc-in 1-CH Transistor Dc-out 4-PIN PDIP SMD T/r", Case/Package=SMD/SMT, Collector Emitter Voltage (VCEO)=400mV, Forward Voltage=1.65V, Manufacturer=Isocom, Manufacturer Part Number=SFH615A-4XSMT/R, Max Operating Temperature=100°C, Max Output Voltage=70V, Min Operating Temperature=-30°C, Output Current per Channel=50mA, Supplier Part Number 1=SFH615A-4XSMCT-ND, Category=Optocouplers, ComponentLink1Description=https://datasheet.ciiva.com/29301/183266-da-01-en-optokoppler-sfh-615a-4xsmt-r-29301200.pdf?src-supplier=Conrad, ComponentLink1URL=https://datasheet.ciiva.com/29301/183266-da-01-en-optokoppler-sfh-615a-4xsmt-r-29301200.pdf?src-supplier=Conrad, Mount="Surface Mount", Number of Channels=1, Packaging="Tape and Reel", RoHS=No, Stock 1=1084, Supplier 1=Digi-Key
U3: library part SHUNTREG_TL431AQDBZR, "2.495V~36V -40℃~+125℃@(TA) 700uA 100mA Adjustable SOT-23(SOT-23-3)  Voltage References ROHS", JLC#=C105255, Package=SOT-23, Part_Number=TL431AQDBZR
U4: library part PWMDRIVER_UC3842AD8TR, "SOIC-8_150mil  AC-DC Controllers & Regulators ROHS", JLC#=C182337, Package=SOIC-8, Part_Number=UC3842AD8TR

## Free pads (board coordinates)
  rrect50% 6x6 hole 3: 1(5.019,3.583)
  round 0 hole 2 slot 40 at 90 deg unplated: 1(108,19)

## Via types
v1: diameter 0.7, hole 0.3, Top Layer to Bottom Layer, tented both sides, 92 vias
v2: diameter 1, hole 0.5, Top Layer to Bottom Layer, tented both sides, 4 vias

## Nets (pads, with @x,y where several pads share a name; then routed paths per layer and width w, separated by ;. In a path a pad name is that pad's centre, name@x,y a point inside that pad or via, vN(x,y) a via of type N, cw(c..) or ccw(c..) an arc to the next point about the centre after c; other vN are vias at no path point)
12V-AUX: C8.1 C9.2 C25.2 C26.2 C27.2 D3.1 R25.2 R34.2 TP_12V-AUX.1 U4.7 | length 82.8
  Top Layer w0.6: v2(36.049,2.495) 41.995,2.495 48,8.5 51,8.5 53.944,5.556 v1(63.549,5.556)
  Bottom Layer w0.6: R25.2 v2(36.049,2.495) ; v1(63.549,5.556) 63.568,5.537 63.834,5.537 63.877,5.495 64.799,5.495 64.813,5.509 65.793,5.509 U4.7 67.849,5.515 68.549,6.215 C25.2 ; D3.1@94.373,8.75 D3.1
  Bottom Layer w1: C9.2 83.75,5.887 83.164,5.302 81.497,5.302 81.087,4.892 81.087,3.179 81.666,2.6 87.891,2.6 88.301,3.01 88.301,4.99 88.25,5.04 C8.1 D3.1@94.373,8.75
  Bottom Layer w1.5: C25.2 C26.2 C27.2 80.193,6.245 R34.2@82.475,6.245 ; R34.2 R34.2@82.475,6.245 ; C9.2 82.475,7.475 R34.2@82.475,6.245
EARTH_GND: CONN1.E HS3.HSMH pad.1@5.019,3.583
GND: C10.2 C12.1 NETTIE2.GNDB R7.1 R15.2 R18.2 TP_GND.1 U1.3 | length 3.3
  Bottom Layer w0.6: NETTIE2.GNDB 52.841,12.066
  Bottom Layer w0.86: R18.2 R15.2@54.313,12.999
HALF_PRI: TRANS1.2
ISO_GND: C5.2 C6.1 C7.1 NETTIE1.GNDB P1.2 P2.2 TP_ISOGND.1 TRANS1.7 | length 0.5
  Bottom Layer w0.6: NETTIE1.GNDB 140.882,9.931
NetC1_1: C1.1 D1.2 D2.2 TRANS1.6 | length 2.6
  Bottom Layer w1.33: D1.2 133.549,48.039 134.301,47.288 134.301,46.178 134.379,46.1 C1.1
NetC1_2: C1.2 R1.1 | length 2.1
  Bottom Layer w1.5: C1.2@134.386,42.907 134.394,42.915 C1.2 134.509,42.915 134.517,42.907 R1.1@134.517,40.986
NetC2_1: C2.1 C3.1 D4.1 R4.1 R5.1 R6.1 | length 27.4
  Top Layer w1.5: R6.1 R5.1 R4.1
  Bottom Layer w1.5: C2.1@42.484,21.745 42.484,19.495 42.484,18.695 44.185,16.995 R5.1 ; C2.1@42.492,22.552 44.185,24.245 R4.1 D4.1
NetC4_1: C4.1 C12.2 | length 3
  Bottom Layer w1.5: C4.1 C12.2
NetC11_1: C11.1 D4.2 Q1.2 TRANS1.3 | length 3.3
  Bottom Layer w1.5: Q1.2 63.286,13.013 63.286,16.293 63.273,16.293 63.28,16.3 C11.1
  other v2: 55.25,24.25 53.5,26.5 55.245,26.511
NetC11_2: C11.2 R8.2 | length 3.3
  Bottom Layer w1.2: C11.2@63.25,19.493 R8.2
  Bottom Layer w1.5: C11.2@63.25,19.493 63.257,19.485 C11.2
NetC13_2: C13.2 C14.2 D6.1 R13.1 R21.2 R22.2 | length 12
  Bottom Layer w1: R21.2 C13.2 C14.2 D6.1 R13.1 R22.2
NetC18_1: C18.1 C22.2 R24.2 | length 6.7
  Bottom Layer w1: C18.1 C22.2 119.925,6.8 120.925,7.8 R24.2
NetC18_2: C18.2 R22.1 U2.2 U3.1 | length 24
  Top Layer w0.6: v1(116.55,5.8) 117.85,7.1 128.8,7.1 v1(130.3,5.6)
  Bottom Layer w0.6: C18.2 v1(116.55,5.8) ; R22.1 v1(130.3,5.6)
  Bottom Layer w1.5: U3.1 112.8,4.285 112.815,4.3 C18.2
NetC22_1: C22.1 R28.2 | length 2.5
  Bottom Layer w1: C22.1 R28.2
NetC23_2: C23.2 R33.2 R36.2 TP_Verr.1 U2.3 | length 57
  Top Layer w0.6: v1@49.048,7.225 51.974,4.3 TP_Verr.1
  Bottom Layer w0.6: v1(49.029,7.245) R33.2
  Bottom Layer w1.5: TP_Verr.1 C23.2 99.065,4.285 U2.3
NetC24_1: C24.1 Q2.1 R35.1 TP_SS.1 | length 7.1
  Bottom Layer w0.6: C24.1@40.757,4.278 C24.1@40.762,4.274 ; R35.1@40.762,2.032 R35.1 ; Q2.1@42.866,4.278 Q2.1
  Bottom Layer w1: C24.1@40.757,4.278 Q2.1@42.866,4.278 ; R35.1@40.762,2.032 C24.1@40.762,4.274
  Bottom Layer w1.5: TP_SS.1 38.061,4.311 C24.1
NetC28_1: C28.1 R37.1 U4.4 | length 10.7
  Bottom Layer w0.6: U4.4 60.26,8.049 61.894,8.049 62.549,7.393 R37.1
  Bottom Layer w1.4: C28.1 R37.1
NetCONN1_L: CONN1.L F1.2
NetCONN1_N: CONN1.N MOV1.1 U1.4
NetD3_2: D3.2 TRANS1.4 | length 16
  Bottom Layer w2.5: TRANS1.4 91.911,27.589 94.5,25 D3.2
NetD5_1: D5.1 R10.1 | length 2.5
  Bottom Layer w1: R10.1 D5.1
NetD7_1: D7.1 R34.1 | length 2.5
  Bottom Layer w1: R34.1 D7.1@84.965,4.035
NetF1_1: F1.1 MOV1.2 U1.1
NetQ1_1: Q1.1 R9.1 R12.2 | length 6.1
  Bottom Layer w0.6: R9.1 R9.1@69.618,13.063
  Bottom Layer w1.5: Q1.1 65.817,12.995 R9.1 R12.2
NetQ2_2: Q2.2 R29.1 | length 2.7
  Bottom Layer w0.6: Q2.2 44.799,2.995 45.411,2.383 45.533,2.383 45.799,2.117 R29.1
NetR1_2: R1.2 R2.2 | length 5.4
  Bottom Layer w1.2: R1.2 134.134,37.784 139.466,37.784 R2.2
NetR2_1: R2.1 R3.2 | length 2.4
  Bottom Layer w1.2: R2.1 R3.2
NetR8_1: R8.1 R11.1 | length 4.2
  Bottom Layer w1.2: R8.1 R11.1
NetR11_2: R11.2 R14.1 | length 2.1
  Bottom Layer w1.2: R14.1 R11.2
NetR14_2: R14.2 R17.1 | length 2.9
  Bottom Layer w1.2: R17.1 R14.2
NetR16_1: R16.1 R17.2 | length 2.3
  Bottom Layer w1.33: R17.2 58.267,21.25 58.291,21.226 58.291,19.041 58.315,19.017 R16.1
NetR20_1: R20.1 R23.2 TP_MODB.1 | length 5.5
  Bottom Layer w1: R23.2 R20.1
  Bottom Layer w1.5: R23.2 134.55,5.05 TP_MODB.1
NetR21_1: R21.1 U2.1 | length 3.8
  Bottom Layer w1: U2.1 112.855,1.8 R21.1
NetR23_1: R23.1 R24.1 R26.2 R27.2 TP_Vfb_Div.1 | length 19.6
  Bottom Layer w0.6: TP_Vfb_Div.1 R24.1 124.3,7.678 125.279,6.699 130.545,6.699 131.258,5.986 131.258,5.714 R23.1@132.55,4.422 ; R23.1 R23.1@132.55,4.422 ; R26.2 R27.2 134.55,8.178 132.55,6.178 R23.1@132.55,4.422
NetR26_1: R26.1 R30.3 | length 2.5
  Bottom Layer w1: R30.3 R26.1
NetR27_1: R27.1 R31.2 | length 2.2
  Bottom Layer w1: R31.2 R27.1
NetR28_1: R28.1 U3.2 | length 5.8
  Bottom Layer w0.6: U3.2 112.8,10.3 113.8,11.3 R28.1@116.3,11.3
NetR32_2: R32.2 R38.2 TP_COMP_ACIN.1 | length 5.6
  Bottom Layer w0.6: TP_COMP_ACIN.1@47.55,6.05 49.001,4.599 49.945,4.599 R38.2
  Bottom Layer w1: R32.2 R38.2
NetR33_1: R33.1 R38.1 U4.2 | length 11.4
  Bottom Layer w0.6: R38.1 56.823,4.495 57.843,5.515 U4.2
  Bottom Layer w1: R38.1 R33.1
S_GND: C8.2 C9.1 C16.1 C17.1 C19.1 C20.1 C21.1 C23.1 C24.2 C25.1 C26.1 C27.1 C28.2 D7.2 NETTIE2.GNDA Q2.3 R12.1 R36.1 TP_SGND.1 TRANS1.5 U4.5 | length 11.5
  Bottom Layer w0.6: 52.85,10.425 NETTIE2.GNDA@52.85,10.994
  Bottom Layer w1.5: TP_SGND.1@34.55,6.3 34.561,6.311 C24.2
  Bottom Layer w2: 90.06,3.144 90.06,4.204 90.06,7.876
  other v1: 58.341,3.006 60,3 67,3.25 76.25,3.25 75.074,3.303 93.639,5.579 91.36,5.639 87.128,5.768 37.5,6 85.5,6 89.3,6 94.5,6 103.5,6 97.5,6.25 42.641,6.377 99,7.75 101.25,7.75 63,9 65.75,9 78,9 81,9 99,9 102,9 66.86,9.039 73.674,9.759 73.657,11.023 73.5,12 76.5,12 82.5,12 85.5,12 91.5,12 94.5,12 97.5,12 100.5,12 103.5,12 83.75,12.25 87,15 90,15 99,15 88.29,15.055 88.5,18 91.5,18 97.5,18 100.5,18 103.5,18 87,21 90,21 99,21 102,21 91.5,24 97.5,24 100.5,24 103.5,24 96,27 99,27 102,27
S_ISO_GND: C13.1 C14.1 D5.2 D6.2 NETTIE1.GNDA R30.1 R30.2 R31.1 TP_S_ISOGND.1 U3.3 | length 0.5
  Bottom Layer w0.6: 139.475,9.925 139.481,9.931 NETTIE1.GNDA
  other v1: 120.78,3.02 126,3 132,3 135,3 138,3 120.751,4.359 124.6,5.299 126.6,5.3 122.397,5.339 121.5,6 115.336,6.478 116.476,7.469 115.456,8.469 114,9 117,9 120,9 126,9 126.7,10.1 121.5,12 133.5,12 139.5,12 135.8,12.2 125.1,12.4 131.8,12.8 126.9,13.4 137.601,14.017 130.2,14.4
Vcomp: R29.2 R32.1 TP_COMP.1 U4.1 | length 17.5
  Top Layer w0.6: v1(47.799,3.995) 49.799,1.995 v1(53.822,1.995)
  Bottom Layer w0.6: R32.1 v1(53.822,1.995) 53.842,2.014 55.014,2.014 TP_COMP.1@55.05,2.05 ; TP_COMP.1@55.596,1.995 57.846,4.245 U4.1
  Bottom Layer w1: R29.2 v1(47.799,3.995)
Vout: C5.1 C6.2 C7.2 D1.1 D2.1 P1.1 P2.1 R3.1 R10.2 R13.2 R20.2 TP_Vout.1 | length 25.9
  Bottom Layer w1: R13.2 TP_Vout.1 138.621,1.8 139.5,2.679 R20.2@139.5,4.5 ; R20.2 R10.2 140.729,8.729 142.809,8.729 P2.1
  Bottom Layer w1.5: C5.1 C7.2 C6.2 ; D1.1 138.979,48.219 R3.1@138.979,45.991
Vpwm: R9.2 U4.6 | length 10.5
  Bottom Layer w0.6: U4.6 64.009,6.785 63.658,7.136 63.658,8.408 65.75,10.5 68.933,10.5 69.427,10.995 R9.2
Vrec: C2.2 C3.2 C4.2 C10.1 NTC1.1 R4.2 R5.2 R6.2 R7.2 R25.1 TP_Vrec.1 TRANS1.1 | length 24.6
  Bottom Layer w2: R25.1@28.167,1.435 R25.1 28.167,6.167 31.745,9.745 R6.2 ; R5.2 39.299,19.495 39.299,21.745 R4.2
Vrec-NTC: NTC1.2 U1.2
Vref-5V: C16.2 C17.2 C19.2 C20.2 C21.2 R35.2 R37.2 U2.4 U4.8 | length 67.4
  Top Layer w0.3: v1(44.094,2.038) 44.094,1.93 44.294,1.73 44.294,1.726 45.145,0.875 62.9,0.875 64.513,2.488 64.513,3.008 v1(64.519,3.013)
  Bottom Layer w0.6: R35.2 42.824,2.019 44.075,2.019 v1(44.094,2.038) ; v1(64.519,3.013) 64.534,2.998 64.534,1.883 64.673,1.745 67.049,1.745 ; U4.8 65.799,2.995 67.049,1.745 ; C20.2 67.049,1.745
  Bottom Layer w1.5: C20.2 C21.2 C19.2 74.144,1.15 90.706,1.15 91.3,1.745 U2.4
Vsense: Q1.3 R15.1 R16.2 R19.2 | length 2.7
  Bottom Layer w0.86: R19.2 R15.1
Vsense_fil_H: C15.1 R19.1 U4.3 | length 5.6
  Bottom Layer w0.6: R19.1 57.284,8.743 57.181,8.639 57.181,8.611 56.841,8.271 C15.1 56.878,6.779 60.248,6.779 U4.3
Vsense_fil_L: C15.2 R18.1 | length 2.2
  Bottom Layer w0.6: R18.1 54.341,8.743 54.841,8.243 C15.2
pads on no net: CONN1.MH1 CONN1.MH2 HS1.HSMH HS2.HSMH MH1.50 MH2.50 MH3.50 MH4.50 TRANS1.100
copper on no net:
  other v1: 74.883,8.153

## Polygon pours and split planes (outlines as drawn)
ISO_GND on Bottom Layer "ISO_GND_L02_P025" (solid, pour order 25): 112.049,57.049 112.049,15.951 112.411,15.589 139.411,15.589 140.486,14.514 140.486,0.514 141,0 150.51,0 151,0.49 151,57 150,58 113,58
S_GND on Bottom Layer "S_GND_L02_P019" (solid, pour order 19): 32.75,0.891 32.75,6.5 34.25,8 46.25,8 49.25,11 62.5,11 63,11.5 66.25,11.5 67.5,12.75 67.5,14 68,14.5 84.25,14.5 85.75,16 85.75,28 87,29.25 102.5,29.25 104.635,27.115 104.635,0.636 104.024,0.023 33.891,-0.246
NetC11_1 on Bottom Layer "NETC11_1_L02_P000" (solid, pour order 0): 52.701,23.16 55.37,23.16 55.908,23.698 55.908,26.557 55.291,27.174 52.867,27.174 52.422,26.729 52.422,23.44
Vsense on Bottom Layer "VSENSE_L02_P005" (solid, pour order 5): 59.697,16.75 56.563,16.75 56.563,11.499 61.177,11.499 61.703,12.025 61.703,14.744
HALF_PRI on Bottom Layer "HALF_PRI_L02_P013" (solid, pour order 13): 83.076,41.546 89.322,41.546 91,43.224 91,47.721 89.416,49.305 84.443,49.305 81.421,46.282 81.421,43.201
GND on Bottom Layer "GND_L02_P017" (solid, pour order 17): 55.058,11.765 55.058,28.058 59,32 63.371,32 65,33.629 65,36.133 63.641,37.493 51.858,37.608 29.743,37.493 27.75,35.5 27.75,13.5 29.653,11.597 54.89,11.597
S_ISO_GND on Bottom Layer "S_ISO_GND_L02_P024" (solid, pour order 24): 112.049,0.951 112.049,14.449 112.4,14.8 139.3,14.8 140,14.1 140,1.5 138.995,0.495 112.505,0.495
EARTH_GND on Bottom Layer "EARTH_GND_L02_P029" (solid, pour order 29): 22,35 22,29 21,28 14,28 9,23 9,2 7.495,0.495 2.505,0.495 1,2 1,35 2,36 21,36
Vrec on Bottom Layer "VREC_L02_P031" (solid, pour order 31): 38.448,42.425 75.312,42.425 83.93,51.043 89.936,51.043 91,52.107 91,55.887 89.887,57 38.639,57 37.582,55.942 37.582,43.292
Vrec on Top Layer "Top Layer-Vrec" (solid, pour order 33): 74.387,41.5 83.93,51.043 89.936,51.043 91,52.107 91,55.887 89.887,57 38.639,57 37.582,55.942 37.582,43.292 38.873,42 42.5,42 42.5,36.25 36.5,30.25 36.5,9.25 37.028,8.722 40.333,8.722 40.75,9.139 40.75,21.4 60.85,41.5
S_GND on Top Layer "S_GND_L01_P018" (solid, pour order 18): 32.75,0.891 32.75,6.5 34.25,8 46.25,8 47.5,9.25 60.75,9.25 63,11.5 66.25,11.5 67.5,12.75 67.5,14 68,14.5 84.25,14.5 85.75,16 85.75,28 87,29.25 102.5,29.25 104.635,27.115 104.635,0.636 104.024,0.023 33.891,-0.246
NetCONN1_L on Top Layer "NETCONN1_L_L01_P002" (solid, pour order 2): 18.269,38.731 21.731,38.731 23,40 23,43 25,45 27,45 28,46 28,50 27,51 19,51 17,49 17,40
NetF1_1 on Top Layer "NETF1_1_L01_P003" (solid, pour order 3): 30.828,49.68 34.684,49.68 35.622,48.741 35.622,40.932 35.048,40.358 26.844,40.358 26,41.201 26,43.127 26.873,44 28,44 30,46 30,48.851
NetC11_1 on Top Layer "NETC11_1_L01_P008" (solid, pour order 8): 62.433,13.567 62.433,11.258 62.691,11 63.896,11 64.102,11.206 64.102,14.102 65.26,15.26 81.26,15.26 83,17 83,27.771 86.229,31 89.047,31 90.3,32.253 90.3,38.315 89.502,39.113 67.243,39.113 65,36.87 65,33.252 62.748,31 54,31 52.5,29.5 52.5,23.5
NetCONN1_N on Top Layer "NETCONN1_N_L01_P011" (solid, pour order 11): 34.838,21 18.056,21 17,22.056 17,25.16 17.84,26 21.985,26 24,28.015 24,37.346 25.654,39 29.784,39 31,37.784 31,29 32,28 35,28 36,27 36,22.162
Vrec-NTC on Top Layer "VREC-NTC_L01_P015" (solid, pour order 15): 32.476,37.884 32.476,34.813 33.04,34.25 41.239,34.25 41.641,34.652 41.641,37.681 40.822,38.5 33.093,38.5
S_ISO_GND on Top Layer "S_ISO_GND_L01_P020" (solid, pour order 20): 112.049,0.951 112.049,14.449 112.4,14.8 139.3,14.8 140,14.1 140,1.5 138.995,0.495 112.505,0.495
NetC1_1 on Top Layer "NETC1_1_L01_P022" (solid, pour order 22): 112.098,54.075 112.171,51.184 112.07,41.94 113.989,40 128,40 130,38 130,34 131,33 135,33 135.666,33.666 135.666,54.334 134,56 113.975,56
Vout on Top Layer "VOUT_L01_P023" (solid, pour order 23): 137.505,50.505 149.495,50.505 150,50 150,7 149.217,6.217 141.783,6.217 141,7 141,14 133,22 133,29 136.404,32.404 136.404,49.404
EARTH_GND on Top Layer "EARTH_GND_L01_P026" (solid, pour order 26): 22,35 22,29 21,28 14,28 9,23 9,2 7.495,0.495 2.505,0.495 1,2 1,35 2,36 21,36
HALF_PRI on Top Layer "HALF_PRI_L01_P032" (solid, pour order 32): 83.076,41.546 89.322,41.546 91,43.224 91,47.721 89.416,49.305 84.443,49.305 81.421,46.282 81.421,43.201

## Keep-outs
Keep-Out Layer:
  the board outline again, w0.3

## Silkscreen, mask and mechanical layers (free items; w line width, h text height)
Top Overlay:
  drawing of 46 lines, arcs and shapes, not listed
  text "Flyback V1.0 / ----------- / Jan 2023 / Arturo S B" at 95.1,50.275 h1
  text "Danger / --------------------- / Apply conformal coating" at 6.55,45.286 h1.52 r270
  text "GND" at 149.78,24.188 h1 r90
  text "24V" at 149.81,19.625 h1 r90
  text "Flyback V1.0 / ----------- / Jan 2023 / ASB" at 22.044,14.775 h0.9
  text "GND" at 149.809,12.988 h1 r90
  text "24V" at 149.836,7.605 h1 r90
  text "EARTH" at 0.589,5.875 h1 r270
Bottom Overlay:
  drawing of 46 lines, arcs and shapes, not listed

## Text inside footprints (layer, text, board x,y; h text height)
C5: Top Overlay "+" at 136.979,27.654 h0.8 r90; Top Overlay "+" at 136.879,21.954 h0.8 r90